# EAGLE board lipo-charger-PANEL (EAGLE 9.5.2)
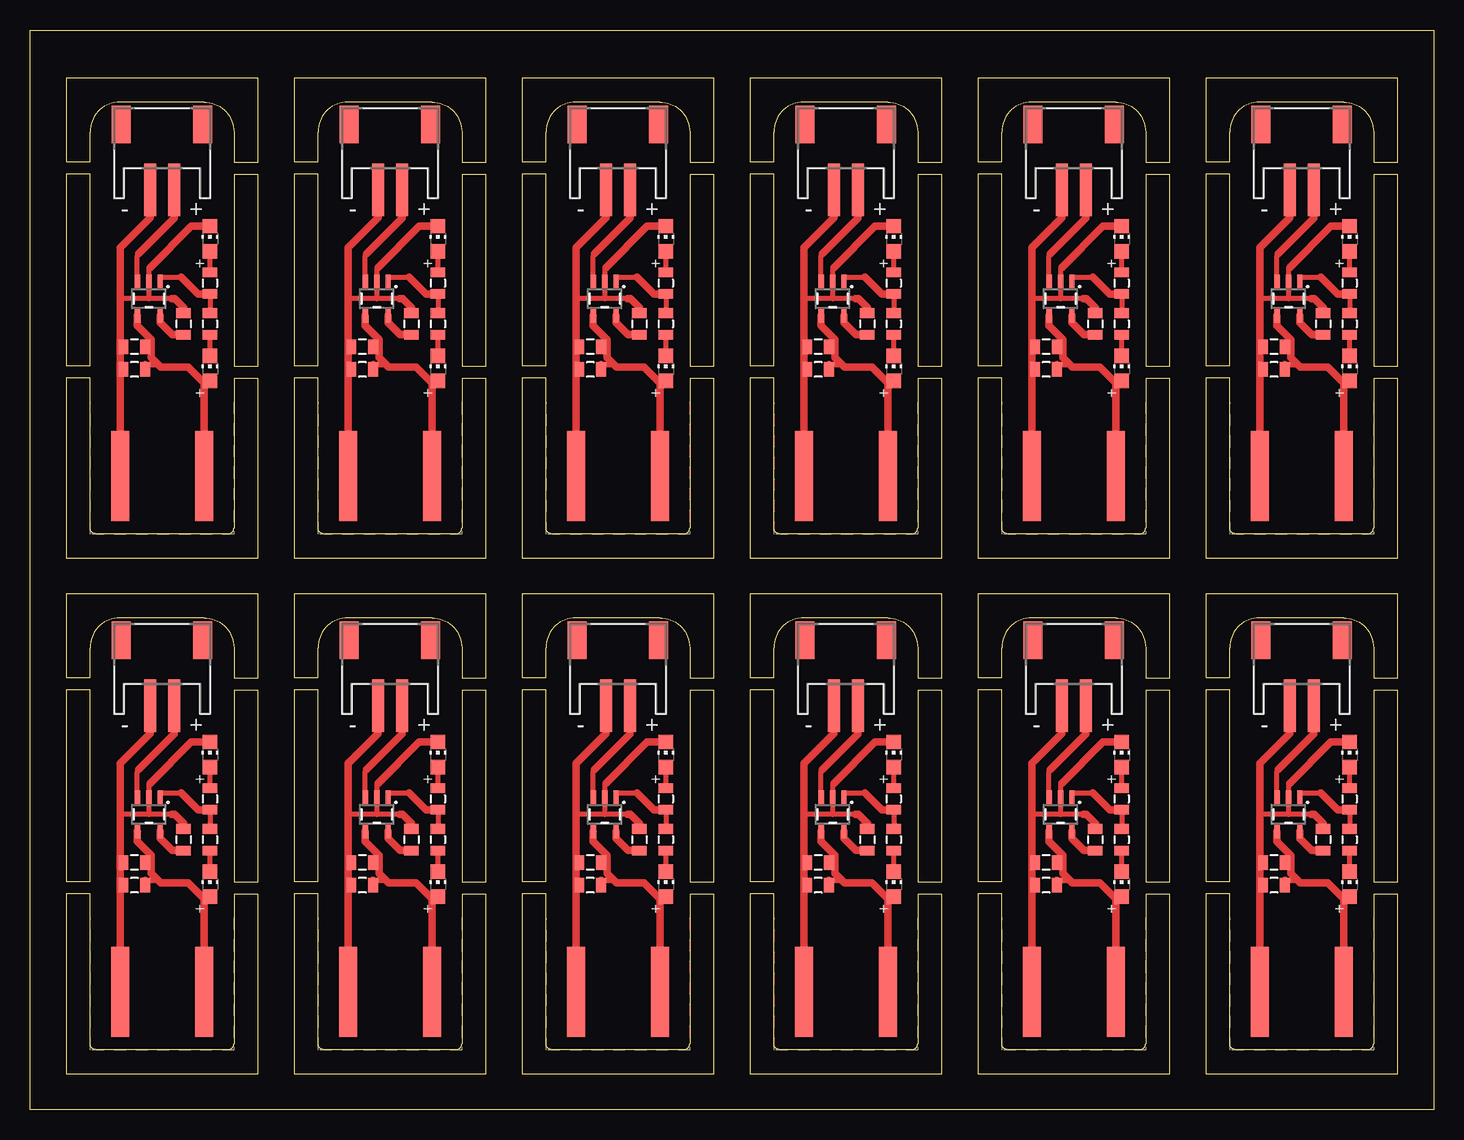
[diagram p0: board, top side]

Size 117 x 90 mm. Coordinates in mm from the lower left corner, seen from the top.
Outline: 0,0 0,90 117,90 117,0 0,0
Outline: 5,5.5 5,18 3,18 3,3 19,3 19,18 17,18 17,5.5 arc-90 16.5,5 5.5,5 arc-90 5,5.5
Outline: 5,19 5,35 3,35 3,19 5,19
Outline: 5,36 5,38.5 arc-90 7.5,41 14.5,41 arc-90 17,38.5 17,36 19,36 19,43 3,43 3,36 5,36
Outline: 17,35 17,19 19,19 19,35 17,35
Outline: 5,48.5 5,61 3,61 3,46 19,46 19,61 17,61 17,48.5 arc-90 16.5,48 5.5,48 arc-90 5,48.5
Outline: 5,62 5,78 3,78 3,62 5,62
Outline: 5,79 5,81.5 arc-90 7.5,84 14.5,84 arc-90 17,81.5 17,79 19,79 19,86 3,86 3,79 5,79
Outline: 17,78 17,62 19,62 19,78 17,78
Outline: 24,5.5 24,18 22,18 22,3 38,3 38,18 36,18 36,5.5 arc-90 35.5,5 24.5,5 arc-90 24,5.5
Outline: 24,19 24,35 22,35 22,19 24,19
Outline: 24,36 24,38.5 arc-90 26.5,41 33.5,41 arc-90 36,38.5 36,36 38,36 38,43 22,43 22,36 24,36
Outline: 36,35 36,19 38,19 38,35 36,35
Outline: 24,48.5 24,61 22,61 22,46 38,46 38,61 36,61 36,48.5 arc-90 35.5,48 24.5,48 arc-90 24,48.5
Outline: 24,62 24,78 22,78 22,62 24,62
Outline: 24,79 24,81.5 arc-90 26.5,84 33.5,84 arc-90 36,81.5 36,79 38,79 38,86 22,86 22,79 24,79
Outline: 36,78 36,62 38,62 38,78 36,78
Outline: 43,5.5 43,18 41,18 41,3 57,3 57,18 55,18 55,5.5 arc-90 54.5,5 43.5,5 arc-90 43,5.5
Outline: 43,19 43,35 41,35 41,19 43,19
Outline: 43,36 43,38.5 arc-90 45.5,41 52.5,41 arc-90 55,38.5 55,36 57,36 57,43 41,43 41,36 43,36
Outline: 55,35 55,19 57,19 57,35 55,35
Outline: 43,48.5 43,61 41,61 41,46 57,46 57,61 55,61 55,48.5 arc-90 54.5,48 43.5,48 arc-90 43,48.5
Outline: 43,62 43,78 41,78 41,62 43,62
Outline: 43,79 43,81.5 arc-90 45.5,84 52.5,84 arc-90 55,81.5 55,79 57,79 57,86 41,86 41,79 43,79
Outline: 55,78 55,62 57,62 57,78 55,78
Outline: 62,5.5 62,18 60,18 60,3 76,3 76,18 74,18 74,5.5 arc-90 73.5,5 62.5,5 arc-90 62,5.5
Outline: 62,19 62,35 60,35 60,19 62,19
Outline: 62,36 62,38.5 arc-90 64.5,41 71.5,41 arc-90 74,38.5 74,36 76,36 76,43 60,43 60,36 62,36
Outline: 74,35 74,19 76,19 76,35 74,35
Outline: 62,48.5 62,61 60,61 60,46 76,46 76,61 74,61 74,48.5 arc-90 73.5,48 62.5,48 arc-90 62,48.5
Outline: 62,62 62,78 60,78 60,62 62,62
Outline: 62,79 62,81.5 arc-90 64.5,84 71.5,84 arc-90 74,81.5 74,79 76,79 76,86 60,86 60,79 62,79
Outline: 74,78 74,62 76,62 76,78 74,78
Outline: 81,5.5 81,18 79,18 79,3 95,3 95,18 93,18 93,5.5 arc-90 92.5,5 81.5,5 arc-90 81,5.5
Outline: 81,19 81,35 79,35 79,19 81,19
Outline: 81,36 81,38.5 arc-90 83.5,41 90.5,41 arc-90 93,38.5 93,36 95,36 95,43 79,43 79,36 81,36
Outline: 93,35 93,19 95,19 95,35 93,35
Outline: 81,48.5 81,61 79,61 79,46 95,46 95,61 93,61 93,48.5 arc-90 92.5,48 81.5,48 arc-90 81,48.5
Outline: 81,62 81,78 79,78 79,62 81,62
Outline: 81,79 81,81.5 arc-90 83.5,84 90.5,84 arc-90 93,81.5 93,79 95,79 95,86 79,86 79,79 81,79
Outline: 93,78 93,62 95,62 95,78 93,78
Outline: 100,5.5 100,18 98,18 98,3 114,3 114,18 112,18 112,5.5 arc-90 111.5,5 100.5,5 arc-90 100,5.5
Outline: 100,19 100,35 98,35 98,19 100,19
Outline: 100,36 100,38.5 arc-90 102.5,41 109.5,41 arc-90 112,38.5 112,36 114,36 114,43 98,43 98,36 100,36
Outline: 112,35 112,19 114,19 114,35 112,35
Outline: 100,48.5 100,61 98,61 98,46 114,46 114,61 112,61 112,48.5 arc-90 111.5,48 100.5,48 arc-90 100,48.5
Outline: 100,62 100,78 98,78 98,62 100,62
Outline: 100,79 100,81.5 arc-90 102.5,84 109.5,84 arc-90 112,81.5 112,79 114,79 114,86 98,86 98,79 100,79
Outline: 112,78 112,62 114,62 114,78 112,78
Copper layers (1*16): Top 0.035mm / dielectric 1.5mm / Bottom 0.035mm
Design rules "default": minimum track width 16mil, minimum drill 0.8mm, track to track 0.8mm, track to pad 0.8mm, pad to pad 0.8mm, via to via 0.8mm, smd to smd 0mil, copper to edge 1mil, drill to drill 1mil, minimum pad ring 10mil, minimum via ring 10mil, stop-mask expansion 1mil, vias tented up to drill 30mil, thermal gap 10mil

## Footprints (pad centres in the part's own frame; a part is rotated, then mirrored left to right if it is on the bottom)
0805 = smd 0.8 x 1.2: 1 -0.9,0; 2 0.9,0
SOT23-5 = smd 0.45 x 1.2: 1 -0.95,-1.4; 2 0,-1.4; 3 0.95,-1.4; 4 0.95,1.4; 5 -0.95,1.4
CHIP-LED0805 = smd 1.2 x 1.2: A 0,-1.05; C 0,1.05
JST-PH-2-SMT-RA = smd 1 x 4.35: 1 1,-3.825; 2 -1,-3.825 | smd 1.6 x 3.15: NC1 -3.4,1.625; NC2 3.4,1.625
USB-PCB-POWER = smd 7.5 x 1.5: 5V -0.2,-3.5; GND -0.2,3.5

## Placement (x,y rotation side)
C1  10uF  [0805]  27.7,18.7 180 top
C2  0.1uF  [0805]  27.7,20.6 180 top
C3  10uF  [0805]  27.7,61.7 180 top
C4  0.1uF  [0805]  27.7,63.6 180 top
C5  10uF  [0805]  46.7,18.7 180 top
C6  0.1uF  [0805]  46.7,20.6 180 top
C7  10uF  [0805]  46.7,61.7 180 top
C8  0.1uF  [0805]  46.7,63.6 180 top
C9  10uF  [0805]  65.7,18.7 180 top
C10  0.1uF  [0805]  65.7,20.6 180 top
C11  10uF  [0805]  65.7,61.7 180 top
C12  0.1uF  [0805]  65.7,63.6 180 top
C13  10uF  [0805]  84.7,18.7 180 top
C14  0.1uF  [0805]  84.7,20.6 180 top
C15  10uF  [0805]  84.7,61.7 180 top
C16  0.1uF  [0805]  84.7,63.6 180 top
C17  10uF  [0805]  103.7,18.7 180 top
C18  0.1uF  [0805]  103.7,20.6 180 top
C19  10uF  [0805]  103.7,61.7 180 top
C20  0.1uF  [0805]  103.7,63.6 180 top
C21  10uF  [0805]  8.7,18.7 180 top
C22  0.1uF  [0805]  8.7,20.6 180 top
C23  10uF  [0805]  8.7,61.7 180 top
C24  0.1uF  [0805]  8.7,63.6 180 top
IC1  IC_LIPO_CHARGER  [SOT23-5]  28.9,24.6 180 top
IC2  IC_LIPO_CHARGER  [SOT23-5]  28.9,67.6 180 top
IC3  IC_LIPO_CHARGER  [SOT23-5]  47.9,24.6 180 top
IC4  IC_LIPO_CHARGER  [SOT23-5]  47.9,67.6 180 top
IC5  IC_LIPO_CHARGER  [SOT23-5]  66.9,24.6 180 top
IC6  IC_LIPO_CHARGER  [SOT23-5]  66.9,67.6 180 top
IC7  IC_LIPO_CHARGER  [SOT23-5]  85.9,24.6 180 top
IC8  IC_LIPO_CHARGER  [SOT23-5]  85.9,67.6 180 top
IC9  IC_LIPO_CHARGER  [SOT23-5]  104.9,24.6 180 top
IC10  IC_LIPO_CHARGER  [SOT23-5]  104.9,67.6 180 top
IC11  IC_LIPO_CHARGER  [SOT23-5]  9.9,24.6 180 top
IC12  IC_LIPO_CHARGER  [SOT23-5]  9.9,67.6 180 top
LED1  Red  [CHIP-LED0805]  34,18.8 0 top
LED2  Blue  [CHIP-LED0805]  34,29.6 0 top
LED3  Red  [CHIP-LED0805]  34,61.8 0 top
LED4  Blue  [CHIP-LED0805]  34,72.6 0 top
LED5  Red  [CHIP-LED0805]  53,18.8 0 top
LED6  Blue  [CHIP-LED0805]  53,29.6 0 top
LED7  Red  [CHIP-LED0805]  53,61.8 0 top
LED8  Blue  [CHIP-LED0805]  53,72.6 0 top
LED9  Red  [CHIP-LED0805]  72,18.8 0 top
LED10  Blue  [CHIP-LED0805]  72,29.6 0 top
LED11  Red  [CHIP-LED0805]  72,61.8 0 top
LED12  Blue  [CHIP-LED0805]  72,72.6 0 top
LED13  Red  [CHIP-LED0805]  91,18.8 0 top
LED14  Blue  [CHIP-LED0805]  91,29.6 0 top
LED15  Red  [CHIP-LED0805]  91,61.8 0 top
LED16  Blue  [CHIP-LED0805]  91,72.6 0 top
LED17  Red  [CHIP-LED0805]  110,18.8 0 top
LED18  Blue  [CHIP-LED0805]  110,29.6 0 top
LED19  Red  [CHIP-LED0805]  110,61.8 0 top
LED20  Blue  [CHIP-LED0805]  110,72.6 0 top
LED21  Red  [CHIP-LED0805]  15,18.8 0 top
LED22  Blue  [CHIP-LED0805]  15,29.6 0 top
LED23  Red  [CHIP-LED0805]  15,61.8 0 top
LED24  Blue  [CHIP-LED0805]  15,72.6 0 top
R1  1k  [0805]  34,25.9 270 top
R2  1k  [0805]  34,22.5 270 top
R3  10k  [0805]  31.8,22.5 270 top
R4  1k  [0805]  34,68.9 270 top
R5  1k  [0805]  34,65.5 270 top
R6  10k  [0805]  31.8,65.5 270 top
R7  1k  [0805]  53,25.9 270 top
R8  1k  [0805]  53,22.5 270 top
R9  10k  [0805]  50.8,22.5 270 top
R10  1k  [0805]  53,68.9 270 top
R11  1k  [0805]  53,65.5 270 top
R12  10k  [0805]  50.8,65.5 270 top
R13  1k  [0805]  72,25.9 270 top
R14  1k  [0805]  72,22.5 270 top
R15  10k  [0805]  69.8,22.5 270 top
R16  1k  [0805]  72,68.9 270 top
R17  1k  [0805]  72,65.5 270 top
R18  10k  [0805]  69.8,65.5 270 top
R19  1k  [0805]  91,25.9 270 top
R20  1k  [0805]  91,22.5 270 top
R21  10k  [0805]  88.8,22.5 270 top
R22  1k  [0805]  91,68.9 270 top
R23  1k  [0805]  91,65.5 270 top
R24  10k  [0805]  88.8,65.5 270 top
R25  1k  [0805]  110,25.9 270 top
R26  1k  [0805]  110,22.5 270 top
R27  10k  [0805]  107.8,22.5 270 top
R28  1k  [0805]  110,68.9 270 top
R29  1k  [0805]  110,65.5 270 top
R30  10k  [0805]  107.8,65.5 270 top
R31  1k  [0805]  15,25.9 270 top
R32  1k  [0805]  15,22.5 270 top
R33  10k  [0805]  12.8,22.5 270 top
R34  1k  [0805]  15,68.9 270 top
R35  1k  [0805]  15,65.5 270 top
R36  10k  [0805]  12.8,65.5 270 top
U$1  CONN_BATTERY-LIPO-HORIZ  [JST-PH-2-SMT-RA]  30,37.5 0 top
U$2  CONN_USB_PCB_POWER  [USB-PCB-POWER]  30,10 90 top
U$3  CONN_BATTERY-LIPO-HORIZ  [JST-PH-2-SMT-RA]  30,80.5 0 top
U$4  CONN_USB_PCB_POWER  [USB-PCB-POWER]  30,53 90 top
U$5  CONN_BATTERY-LIPO-HORIZ  [JST-PH-2-SMT-RA]  49,37.5 0 top
U$6  CONN_USB_PCB_POWER  [USB-PCB-POWER]  49,10 90 top
U$7  CONN_BATTERY-LIPO-HORIZ  [JST-PH-2-SMT-RA]  49,80.5 0 top
U$8  CONN_USB_PCB_POWER  [USB-PCB-POWER]  49,53 90 top
U$9  CONN_BATTERY-LIPO-HORIZ  [JST-PH-2-SMT-RA]  68,37.5 0 top
U$10  CONN_USB_PCB_POWER  [USB-PCB-POWER]  68,10 90 top
U$11  CONN_BATTERY-LIPO-HORIZ  [JST-PH-2-SMT-RA]  68,80.5 0 top
U$12  CONN_USB_PCB_POWER  [USB-PCB-POWER]  68,53 90 top
U$13  CONN_BATTERY-LIPO-HORIZ  [JST-PH-2-SMT-RA]  87,37.5 0 top
U$14  CONN_USB_PCB_POWER  [USB-PCB-POWER]  87,10 90 top
U$15  CONN_BATTERY-LIPO-HORIZ  [JST-PH-2-SMT-RA]  87,80.5 0 top
U$16  CONN_USB_PCB_POWER  [USB-PCB-POWER]  87,53 90 top
U$17  CONN_BATTERY-LIPO-HORIZ  [JST-PH-2-SMT-RA]  106,37.5 0 top
U$18  CONN_USB_PCB_POWER  [USB-PCB-POWER]  106,10 90 top
U$19  CONN_BATTERY-LIPO-HORIZ  [JST-PH-2-SMT-RA]  106,80.5 0 top
U$20  CONN_USB_PCB_POWER  [USB-PCB-POWER]  106,53 90 top
U$21  CONN_BATTERY-LIPO-HORIZ  [JST-PH-2-SMT-RA]  11,37.5 0 top
U$22  CONN_USB_PCB_POWER  [USB-PCB-POWER]  11,10 90 top
U$23  CONN_BATTERY-LIPO-HORIZ  [JST-PH-2-SMT-RA]  11,80.5 0 top
U$24  CONN_USB_PCB_POWER  [USB-PCB-POWER]  11,53 90 top

## Library data of the parts
C1-C24 IC1-IC12 LED1-LED24 R1-R36 U$1-U$24 = homemade-hardware

## Nets
5V1: C1.1 C2.1 IC1.4 LED1.A U$2.5V
5V2: C3.1 C4.1 IC2.4 LED3.A U$4.5V
5V3: C5.1 C6.1 IC3.4 LED5.A U$6.5V
5V4: C7.1 C8.1 IC4.4 LED7.A U$8.5V
5V5: C9.1 C10.1 IC5.4 LED9.A U$10.5V
5V6: C11.1 C12.1 IC6.4 LED11.A U$12.5V
5V7: C13.1 C14.1 IC7.4 LED13.A U$14.5V
5V8: C15.1 C16.1 IC8.4 LED15.A U$16.5V
5V9: C17.1 C18.1 IC9.4 LED17.A U$18.5V
5V10: C21.1 C22.1 IC11.4 LED21.A U$22.5V
5V11: C23.1 C24.1 IC12.4 LED23.A U$24.5V
5V12: C19.1 C20.1 IC10.4 LED19.A U$20.5V
BATTERY1: IC1.3 U$1.1
BATTERY2: IC2.3 U$3.1
BATTERY3: IC3.3 U$5.1
BATTERY4: IC4.3 U$7.1
BATTERY5: IC5.3 U$9.1
BATTERY6: IC6.3 U$11.1
BATTERY7: IC7.3 U$13.1
BATTERY8: IC8.3 U$15.1
BATTERY9: IC9.3 U$17.1
BATTERY10: IC11.3 U$21.1
BATTERY11: IC12.3 U$23.1
BATTERY12: IC10.3 U$19.1
CURRENT-CONTROL1: IC1.5 R3.2
CURRENT-CONTROL2: IC2.5 R6.2
CURRENT-CONTROL3: IC3.5 R9.2
CURRENT-CONTROL4: IC4.5 R12.2
CURRENT-CONTROL5: IC5.5 R15.2
CURRENT-CONTROL6: IC6.5 R18.2
CURRENT-CONTROL7: IC7.5 R21.2
CURRENT-CONTROL8: IC8.5 R24.2
CURRENT-CONTROL9: IC9.5 R27.2
CURRENT-CONTROL10: IC11.5 R33.2
CURRENT-CONTROL11: IC12.5 R36.2
CURRENT-CONTROL12: IC10.5 R30.2
GND1: C1.2 C2.2 IC1.2 LED2.C R3.1 U$1.2 U$2.GND
GND2: C3.2 C4.2 IC2.2 LED4.C R6.1 U$3.2 U$4.GND
GND3: C5.2 C6.2 IC3.2 LED6.C R9.1 U$5.2 U$6.GND
GND4: C7.2 C8.2 IC4.2 LED8.C R12.1 U$7.2 U$8.GND
GND5: C9.2 C10.2 IC5.2 LED10.C R15.1 U$9.2 U$10.GND
GND6: C11.2 C12.2 IC6.2 LED12.C R18.1 U$11.2 U$12.GND
GND7: C13.2 C14.2 IC7.2 LED14.C R21.1 U$13.2 U$14.GND
GND8: C15.2 C16.2 IC8.2 LED16.C R24.1 U$15.2 U$16.GND
GND9: C17.2 C18.2 IC9.2 LED18.C R27.1 U$17.2 U$18.GND
GND10: C21.2 C22.2 IC11.2 LED22.C R33.1 U$21.2 U$22.GND
GND11: C23.2 C24.2 IC12.2 LED24.C R36.1 U$23.2 U$24.GND
GND12: C19.2 C20.2 IC10.2 LED20.C R30.1 U$19.2 U$20.GND
N$1: LED1.C R2.2
N$2: LED2.A R1.1
N$3: LED3.C R5.2
N$4: LED4.A R4.1
N$5: LED5.C R8.2
N$6: LED6.A R7.1
N$7: LED7.C R11.2
N$8: LED8.A R10.1
N$9: LED9.C R14.2
N$10: LED10.A R13.1
N$11: LED11.C R17.2
N$12: LED12.A R16.1
N$13: LED13.C R20.2
N$14: LED14.A R19.1
N$15: LED15.C R23.2
N$16: LED16.A R22.1
N$17: LED17.C R26.2
N$18: LED18.A R25.1
N$19: LED19.C R29.2
N$20: LED20.A R28.1
N$21: LED21.C R32.2
N$22: LED22.A R31.1
N$23: LED23.C R35.2
N$24: LED24.A R34.1
STATUS1: IC1.1 R1.2 R2.1
STATUS2: IC2.1 R4.2 R5.1
STATUS3: IC3.1 R7.2 R8.1
STATUS4: IC4.1 R10.2 R11.1
STATUS5: IC5.1 R13.2 R14.1
STATUS6: IC6.1 R16.2 R17.1
STATUS7: IC7.1 R19.2 R20.1
STATUS8: IC8.1 R22.2 R23.1
STATUS9: IC9.1 R25.2 R26.1
STATUS10: IC11.1 R31.2 R32.1
STATUS11: IC12.1 R34.2 R35.1
STATUS12: IC10.1 R28.2 R29.1

## Tracks (layer width: path | path; a pad name or v marks a point on that pad's centre or on a via)
5V1
  Top 0.406: 28.6,19.1 29.7,19.1 | 29.9,18.9 30.1,18.9 | 29.1,20.6 C2.1 | 33.75,17.5 33.6,17.5 33.5,17.5
  Top 0.61: IC1.4 27.95,22.35 29.1,21.2 29.1,20.6 29.1,19.7 29.7,19.1 29.9,18.9 | 30.1,18.9 32.2,18.9 33.6,17.5 | C1.1 28.6,19.1 | 33.5,17.5 U$2.5V | LED1.A 33.75,17.5
5V2
  Top 0.406: 28.6,62.1 29.7,62.1 | 29.9,61.9 30.1,61.9 | 29.1,63.6 C4.1 | 33.75,60.5 33.6,60.5 33.5,60.5
  Top 0.61: IC2.4 27.95,65.35 29.1,64.2 29.1,63.6 29.1,62.7 29.7,62.1 29.9,61.9 | 30.1,61.9 32.2,61.9 33.6,60.5 | C3.1 28.6,62.1 | 33.5,60.5 U$4.5V | LED3.A 33.75,60.5
5V3
  Top 0.406: 47.6,19.1 48.7,19.1 | 48.9,18.9 49.1,18.9 | 48.1,20.6 C6.1 | 52.75,17.5 52.6,17.5 52.5,17.5
  Top 0.61: IC3.4 46.95,22.35 48.1,21.2 48.1,20.6 48.1,19.7 48.7,19.1 48.9,18.9 | 49.1,18.9 51.2,18.9 52.6,17.5 | C5.1 47.6,19.1 | 52.5,17.5 U$6.5V | LED5.A 52.75,17.5
5V4
  Top 0.406: 47.6,62.1 48.7,62.1 | 48.9,61.9 49.1,61.9 | 48.1,63.6 C8.1 | 52.75,60.5 52.6,60.5 52.5,60.5
  Top 0.61: IC4.4 46.95,65.35 48.1,64.2 48.1,63.6 48.1,62.7 48.7,62.1 48.9,61.9 | 49.1,61.9 51.2,61.9 52.6,60.5 | C7.1 47.6,62.1 | 52.5,60.5 U$8.5V | LED7.A 52.75,60.5
5V5
  Top 0.406: 66.6,19.1 67.7,19.1 | 67.9,18.9 68.1,18.9 | 67.1,20.6 C10.1 | 71.75,17.5 71.6,17.5 71.5,17.5
  Top 0.61: IC5.4 65.95,22.35 67.1,21.2 67.1,20.6 67.1,19.7 67.7,19.1 67.9,18.9 | 68.1,18.9 70.2,18.9 71.6,17.5 | C9.1 66.6,19.1 | 71.5,17.5 U$10.5V | LED9.A 71.75,17.5
5V6
  Top 0.406: 66.6,62.1 67.7,62.1 | 67.9,61.9 68.1,61.9 | 67.1,63.6 C12.1 | 71.75,60.5 71.6,60.5 71.5,60.5
  Top 0.61: IC6.4 65.95,65.35 67.1,64.2 67.1,63.6 67.1,62.7 67.7,62.1 67.9,61.9 | 68.1,61.9 70.2,61.9 71.6,60.5 | C11.1 66.6,62.1 | 71.5,60.5 U$12.5V | LED11.A 71.75,60.5
5V7
  Top 0.406: 85.6,19.1 86.7,19.1 | 86.9,18.9 87.1,18.9 | 86.1,20.6 C14.1 | 90.75,17.5 90.6,17.5 90.5,17.5
  Top 0.61: IC7.4 84.95,22.35 86.1,21.2 86.1,20.6 86.1,19.7 86.7,19.1 86.9,18.9 | 87.1,18.9 89.2,18.9 90.6,17.5 | C13.1 85.6,19.1 | 90.5,17.5 U$14.5V | LED13.A 90.75,17.5
5V8
  Top 0.406: 85.6,62.1 86.7,62.1 | 86.9,61.9 87.1,61.9 | 86.1,63.6 C16.1 | 90.75,60.5 90.6,60.5 90.5,60.5
  Top 0.61: IC8.4 84.95,65.35 86.1,64.2 86.1,63.6 86.1,62.7 86.7,62.1 86.9,61.9 | 87.1,61.9 89.2,61.9 90.6,60.5 | C15.1 85.6,62.1 | 90.5,60.5 U$16.5V | LED15.A 90.75,60.5
5V9
  Top 0.406: 104.6,19.1 105.7,19.1 | 105.9,18.9 106.1,18.9 | 105.1,20.6 C18.1 | 109.75,17.5 109.6,17.5 109.5,17.5
  Top 0.61: IC9.4 103.95,22.35 105.1,21.2 105.1,20.6 105.1,19.7 105.7,19.1 105.9,18.9 | 106.1,18.9 108.2,18.9 109.6,17.5 | C17.1 104.6,19.1 | 109.5,17.5 U$18.5V | LED17.A 109.75,17.5
5V10
  Top 0.406: 9.6,19.1 10.7,19.1 | 10.9,18.9 11.1,18.9 | 10.1,20.6 C22.1 | 14.75,17.5 14.6,17.5 14.5,17.5
  Top 0.61: IC11.4 8.95,22.35 10.1,21.2 10.1,20.6 10.1,19.7 10.7,19.1 10.9,18.9 | 11.1,18.9 13.2,18.9 14.6,17.5 | C21.1 9.6,19.1 | 14.5,17.5 U$22.5V | LED21.A 14.75,17.5
5V11
  Top 0.406: 9.6,62.1 10.7,62.1 | 10.9,61.9 11.1,61.9 | 10.1,63.6 C24.1 | 14.75,60.5 14.6,60.5 14.5,60.5
  Top 0.61: IC12.4 8.95,65.35 10.1,64.2 10.1,63.6 10.1,62.7 10.7,62.1 10.9,61.9 | 11.1,61.9 13.2,61.9 14.6,60.5 | C23.1 9.6,62.1 | 14.5,60.5 U$24.5V | LED23.A 14.75,60.5
5V12
  Top 0.406: 104.6,62.1 105.7,62.1 | 105.9,61.9 106.1,61.9 | 105.1,63.6 C20.1 | 109.75,60.5 109.6,60.5 109.5,60.5
  Top 0.61: IC10.4 103.95,65.35 105.1,64.2 105.1,63.6 105.1,62.7 105.7,62.1 105.9,61.9 | 106.1,61.9 108.2,61.9 109.6,60.5 | C19.1 104.6,62.1 | 109.5,60.5 U$20.5V | LED19.A 109.75,60.5
BATTERY1
  Top 0.406: IC1.3 27.95,28.2 28.05,28.3 28.05,28.35
  Top 0.61: 28.05,28.35 31,31.3 U$1.1
BATTERY2
  Top 0.406: IC2.3 27.95,71.2 28.05,71.3 28.05,71.35
  Top 0.61: 28.05,71.35 31,74.3 U$3.1
BATTERY3
  Top 0.406: IC3.3 46.95,28.2 47.05,28.3 47.05,28.35
  Top 0.61: 47.05,28.35 50,31.3 U$5.1
BATTERY4
  Top 0.406: IC4.3 46.95,71.2 47.05,71.3 47.05,71.35
  Top 0.61: 47.05,71.35 50,74.3 U$7.1
BATTERY5
  Top 0.406: IC5.3 65.95,28.2 66.05,28.3 66.05,28.35
  Top 0.61: 66.05,28.35 69,31.3 U$9.1
BATTERY6
  Top 0.406: IC6.3 65.95,71.2 66.05,71.3 66.05,71.35
  Top 0.61: 66.05,71.35 69,74.3 U$11.1
BATTERY7
  Top 0.406: IC7.3 84.95,28.2 85.05,28.3 85.05,28.35
  Top 0.61: 85.05,28.35 88,31.3 U$13.1
BATTERY8
  Top 0.406: IC8.3 84.95,71.2 85.05,71.3 85.05,71.35
  Top 0.61: 85.05,71.35 88,74.3 U$15.1
BATTERY9
  Top 0.406: IC9.3 103.95,28.2 104.05,28.3 104.05,28.35
  Top 0.61: 104.05,28.35 107,31.3 U$17.1
BATTERY10
  Top 0.406: IC11.3 8.95,28.2 9.05,28.3 9.05,28.35
  Top 0.61: 9.05,28.35 12,31.3 U$21.1
BATTERY11
  Top 0.406: IC12.3 8.95,71.2 9.05,71.3 9.05,71.35
  Top 0.61: 9.05,71.35 12,74.3 U$23.1
BATTERY12
  Top 0.406: IC10.3 103.95,71.2 104.05,71.3 104.05,71.35
  Top 0.61: 104.05,71.35 107,74.3 U$19.1
CURRENT-CONTROL1
  Top 0.61: R3.2 30.85,21.6 29.85,22.6 IC1.5
CURRENT-CONTROL2
  Top 0.61: R6.2 30.85,64.6 29.85,65.6 IC2.5
CURRENT-CONTROL3
  Top 0.61: R9.2 49.85,21.6 48.85,22.6 IC3.5
CURRENT-CONTROL4
  Top 0.61: R12.2 49.85,64.6 48.85,65.6 IC4.5
CURRENT-CONTROL5
  Top 0.61: R15.2 68.85,21.6 67.85,22.6 IC5.5
CURRENT-CONTROL6
  Top 0.61: R18.2 68.85,64.6 67.85,65.6 IC6.5
CURRENT-CONTROL7
  Top 0.61: R21.2 87.85,21.6 86.85,22.6 IC7.5
CURRENT-CONTROL8
  Top 0.61: R24.2 87.85,64.6 86.85,65.6 IC8.5
CURRENT-CONTROL9
  Top 0.61: R27.2 106.85,21.6 105.85,22.6 IC9.5
CURRENT-CONTROL10
  Top 0.61: R33.2 11.85,21.6 10.85,22.6 IC11.5
CURRENT-CONTROL11
  Top 0.61: R36.2 11.85,64.6 10.85,65.6 IC12.5
CURRENT-CONTROL12
  Top 0.61: R30.2 106.85,64.6 105.85,65.6 IC10.5
GND1
  Top 0.406: 29,27.2 29,27.1 28.9,27 IC1.2 28.9,24.6 | 30.8,24.6 28.9,24.6 | 28.9,24.6 26.5,24.6 | C2.2 26.5,20.6 | C1.2 26.5,18.7
  Top 0.61: 29,27.2 32.45,30.65 LED2.C | U$1.2 29,31.38 26.5,28.88 26.5,24.6 26.5,20.6 26.5,18.7 U$2.GND | R3.1 31.8,23.85 31.05,24.6 30.8,24.6
GND2
  Top 0.406: 29,70.2 29,70.1 28.9,70 IC2.2 28.9,67.6 | 30.8,67.6 28.9,67.6 | 28.9,67.6 26.5,67.6 | C4.2 26.5,63.6 | C3.2 26.5,61.7
  Top 0.61: 29,70.2 32.45,73.65 LED4.C | U$3.2 29,74.38 26.5,71.88 26.5,67.6 26.5,63.6 26.5,61.7 U$4.GND | R6.1 31.8,66.85 31.05,67.6 30.8,67.6
GND3
  Top 0.406: 48,27.2 48,27.1 47.9,27 IC3.2 47.9,24.6 | 49.8,24.6 47.9,24.6 | 47.9,24.6 45.5,24.6 | C6.2 45.5,20.6 | C5.2 45.5,18.7
  Top 0.61: 48,27.2 51.45,30.65 LED6.C | U$5.2 48,31.38 45.5,28.88 45.5,24.6 45.5,20.6 45.5,18.7 U$6.GND | R9.1 50.8,23.85 50.05,24.6 49.8,24.6
GND4
  Top 0.406: 48,70.2 48,70.1 47.9,70 IC4.2 47.9,67.6 | 49.8,67.6 47.9,67.6 | 47.9,67.6 45.5,67.6 | C8.2 45.5,63.6 | C7.2 45.5,61.7
  Top 0.61: 48,70.2 51.45,73.65 LED8.C | U$7.2 48,74.38 45.5,71.88 45.5,67.6 45.5,63.6 45.5,61.7 U$8.GND | R12.1 50.8,66.85 50.05,67.6 49.8,67.6
GND5
  Top 0.406: 67,27.2 67,27.1 66.9,27 IC5.2 66.9,24.6 | 68.8,24.6 66.9,24.6 | 66.9,24.6 64.5,24.6 | C10.2 64.5,20.6 | C9.2 64.5,18.7
  Top 0.61: 67,27.2 70.45,30.65 LED10.C | U$9.2 67,31.38 64.5,28.88 64.5,24.6 64.5,20.6 64.5,18.7 U$10.GND | R15.1 69.8,23.85 69.05,24.6 68.8,24.6
GND6
  Top 0.406: 67,70.2 67,70.1 66.9,70 IC6.2 66.9,67.6 | 68.8,67.6 66.9,67.6 | 66.9,67.6 64.5,67.6 | C12.2 64.5,63.6 | C11.2 64.5,61.7
  Top 0.61: 67,70.2 70.45,73.65 LED12.C | U$11.2 67,74.38 64.5,71.88 64.5,67.6 64.5,63.6 64.5,61.7 U$12.GND | R18.1 69.8,66.85 69.05,67.6 68.8,67.6
GND7
  Top 0.406: 86,27.2 86,27.1 85.9,27 IC7.2 85.9,24.6 | 87.8,24.6 85.9,24.6 | 85.9,24.6 83.5,24.6 | C14.2 83.5,20.6 | C13.2 83.5,18.7
  Top 0.61: 86,27.2 89.45,30.65 LED14.C | U$13.2 86,31.38 83.5,28.88 83.5,24.6 83.5,20.6 83.5,18.7 U$14.GND | R21.1 88.8,23.85 88.05,24.6 87.8,24.6
GND8
  Top 0.406: 86,70.2 86,70.1 85.9,70 IC8.2 85.9,67.6 | 87.8,67.6 85.9,67.6 | 85.9,67.6 83.5,67.6 | C16.2 83.5,63.6 | C15.2 83.5,61.7
  Top 0.61: 86,70.2 89.45,73.65 LED16.C | U$15.2 86,74.38 83.5,71.88 83.5,67.6 83.5,63.6 83.5,61.7 U$16.GND | R24.1 88.8,66.85 88.05,67.6 87.8,67.6
GND9
  Top 0.406: 105,27.2 105,27.1 104.9,27 IC9.2 104.9,24.6 | 106.8,24.6 104.9,24.6 | 104.9,24.6 102.5,24.6 | C18.2 102.5,20.6 | C17.2 102.5,18.7
  Top 0.61: 105,27.2 108.45,30.65 LED18.C | U$17.2 105,31.38 102.5,28.88 102.5,24.6 102.5,20.6 102.5,18.7 U$18.GND | R27.1 107.8,23.85 107.05,24.6 106.8,24.6
GND10
  Top 0.406: 10,27.2 10,27.1 9.9,27 IC11.2 9.9,24.6 | 11.8,24.6 9.9,24.6 | 9.9,24.6 7.5,24.6 | C22.2 7.5,20.6 | C21.2 7.5,18.7
  Top 0.61: 10,27.2 13.45,30.65 LED22.C | U$21.2 10,31.38 7.5,28.88 7.5,24.6 7.5,20.6 7.5,18.7 U$22.GND | R33.1 12.8,23.85 12.05,24.6 11.8,24.6
GND11
  Top 0.406: 10,70.2 10,70.1 9.9,70 IC12.2 9.9,67.6 | 11.8,67.6 9.9,67.6 | 9.9,67.6 7.5,67.6 | C24.2 7.5,63.6 | C23.2 7.5,61.7
  Top 0.61: 10,70.2 13.45,73.65 LED24.C | U$23.2 10,74.38 7.5,71.88 7.5,67.6 7.5,63.6 7.5,61.7 U$24.GND | R36.1 12.8,66.85 12.05,67.6 11.8,67.6
GND12
  Top 0.406: 105,70.2 105,70.1 104.9,70 IC10.2 104.9,67.6 | 106.8,67.6 104.9,67.6 | 104.9,67.6 102.5,67.6 | C20.2 102.5,63.6 | C19.2 102.5,61.7
  Top 0.61: 105,70.2 108.45,73.65 LED20.C | U$19.2 105,74.38 102.5,71.88 102.5,67.6 102.5,63.6 102.5,61.7 U$20.GND | R30.1 107.8,66.85 107.05,67.6 106.8,67.6
N$1
  Top 0.406: LED1.C R2.2
N$2
  Top 0.406: R1.1 LED2.A
N$3
  Top 0.406: LED3.C R5.2
N$4
  Top 0.406: R4.1 LED4.A
N$5
  Top 0.406: LED5.C R8.2
N$6
  Top 0.406: R7.1 LED6.A
N$7
  Top 0.406: LED7.C R11.2
N$8
  Top 0.406: R10.1 LED8.A
N$9
  Top 0.406: LED9.C R14.2
N$10
  Top 0.406: R13.1 LED10.A
N$11
  Top 0.406: LED11.C R17.2
N$12
  Top 0.406: R16.1 LED12.A
N$13
  Top 0.406: LED13.C R20.2
N$14
  Top 0.406: R19.1 LED14.A
N$15
  Top 0.406: LED15.C R23.2
N$16
  Top 0.406: R22.1 LED16.A
N$17
  Top 0.406: LED17.C R26.2
N$18
  Top 0.406: R25.1 LED18.A
N$19
  Top 0.406: LED19.C R29.2
N$20
  Top 0.406: R28.1 LED20.A
N$21
  Top 0.406: LED21.C R32.2
N$22
  Top 0.406: R31.1 LED22.A
N$23
  Top 0.406: LED23.C R35.2
N$24
  Top 0.406: R34.1 LED24.A
STATUS1
  Top 0.406: R1.2 R2.1 | IC1.1 29.85,26.4 31.6,26.4
  Top 0.61: 31.6,26.4 33,25 R1.2
STATUS2
  Top 0.406: R4.2 R5.1 | IC2.1 29.85,69.4 31.6,69.4
  Top 0.61: 31.6,69.4 33,68 R4.2
STATUS3
  Top 0.406: R7.2 R8.1 | IC3.1 48.85,26.4 50.6,26.4
  Top 0.61: 50.6,26.4 52,25 R7.2
STATUS4
  Top 0.406: R10.2 R11.1 | IC4.1 48.85,69.4 50.6,69.4
  Top 0.61: 50.6,69.4 52,68 R10.2
STATUS5
  Top 0.406: R13.2 R14.1 | IC5.1 67.85,26.4 69.6,26.4
  Top 0.61: 69.6,26.4 71,25 R13.2
STATUS6
  Top 0.406: R16.2 R17.1 | IC6.1 67.85,69.4 69.6,69.4
  Top 0.61: 69.6,69.4 71,68 R16.2
STATUS7
  Top 0.406: R19.2 R20.1 | IC7.1 86.85,26.4 88.6,26.4
  Top 0.61: 88.6,26.4 90,25 R19.2
STATUS8
  Top 0.406: R22.2 R23.1 | IC8.1 86.85,69.4 88.6,69.4
  Top 0.61: 88.6,69.4 90,68 R22.2
STATUS9
  Top 0.406: R25.2 R26.1 | IC9.1 105.85,26.4 107.6,26.4
  Top 0.61: 107.6,26.4 109,25 R25.2
STATUS10
  Top 0.406: R31.2 R32.1 | IC11.1 10.85,26.4 12.6,26.4
  Top 0.61: 12.6,26.4 14,25 R31.2
STATUS11
  Top 0.406: R34.2 R35.1 | IC12.1 10.85,69.4 12.6,69.4
  Top 0.61: 12.6,69.4 14,68 R34.2
STATUS12
  Top 0.406: R28.2 R29.1 | IC10.1 105.85,69.4 107.6,69.4
  Top 0.61: 107.6,69.4 109,68 R28.2